# Altium PCB PCB.PcbDoc (part 2 of 2)
Units mil, origin at the board's own origin, x right, y up, seen from the top; angles counter-clockwise.
Board outline 7300 x 4900 mil, 2 copper layers (Top Layer, Bottom Layer); 73 components, 57 nets, 300 pads, 64 vias.
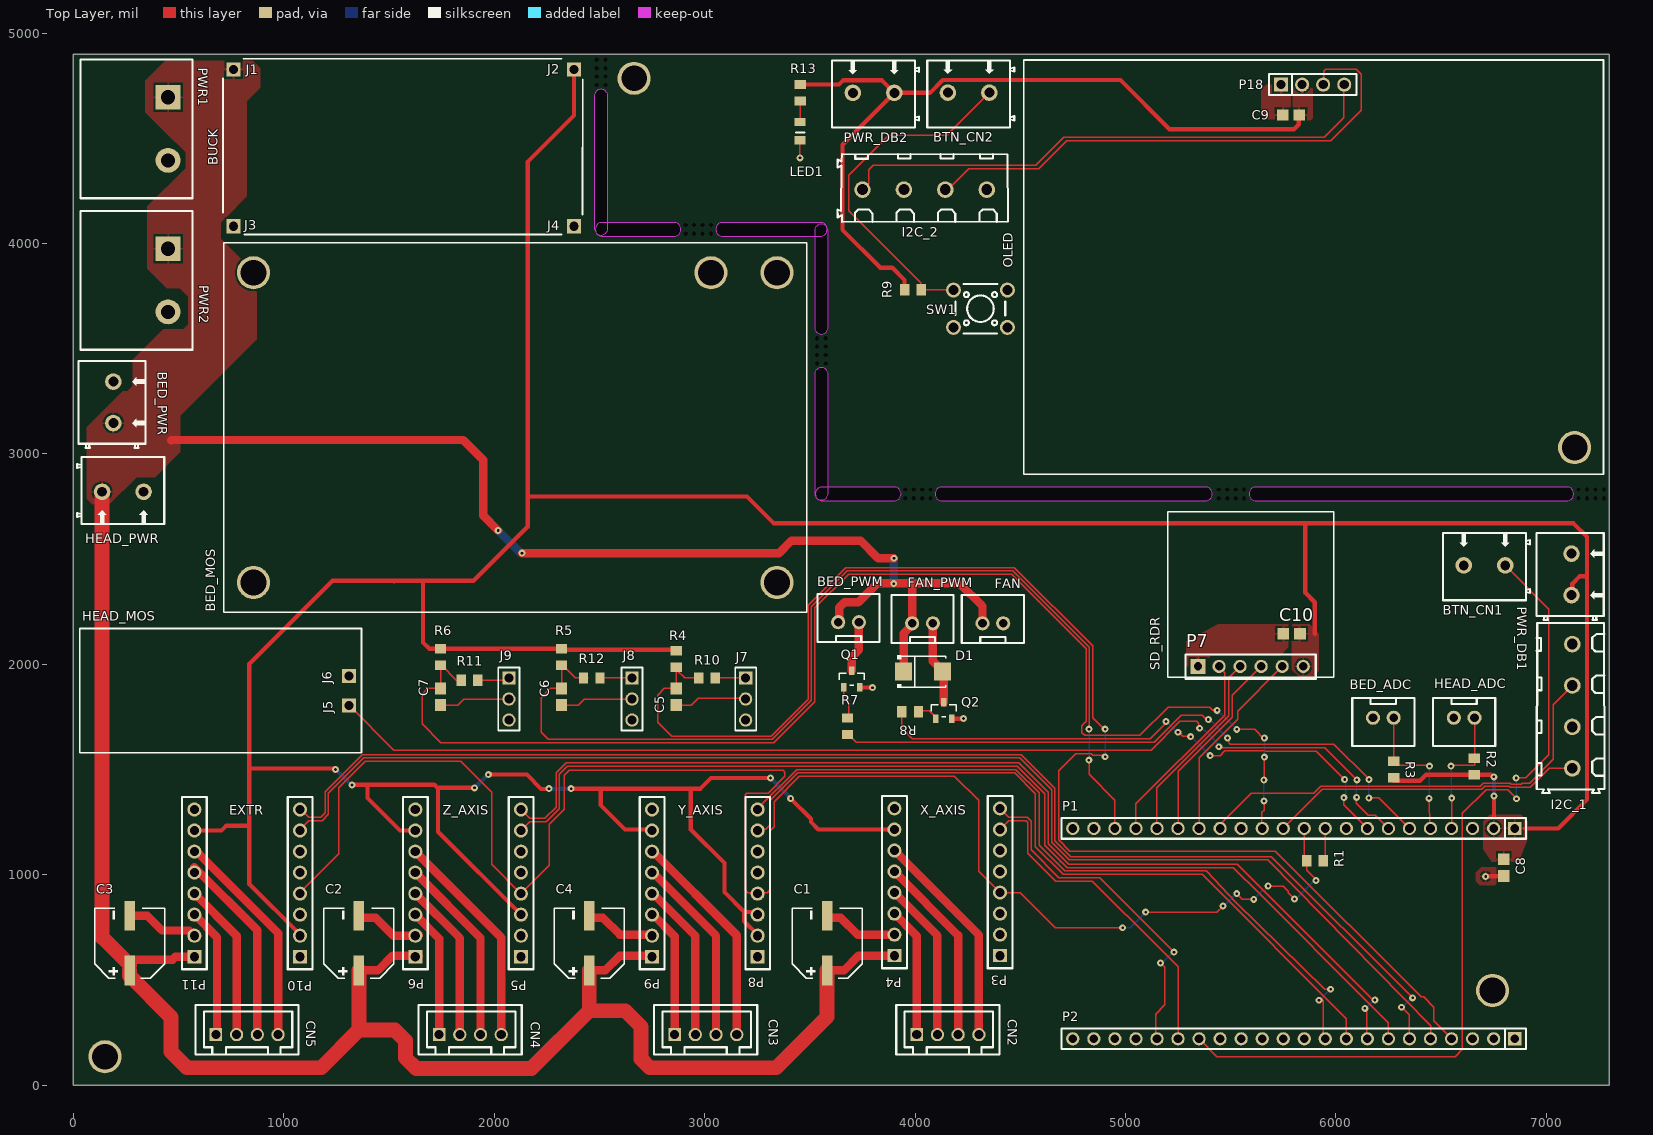
[diagram p0: Top Layer view]

## Via types
v1: diameter 33, hole 13, Top Layer to Bottom Layer, 64 vias

## Nets (pads, with @x,y where several pads share a name; then routed paths per layer and width w, separated by ;. In a path a pad name is that pad's centre, name@x,y a point inside that pad or via, vN(x,y) a via of type N, cw(c..) or ccw(c..) an arc to the next point about the centre after c; other vN are vias at no path point) (continued)
pads on no net: BED_MOS.1 J7.3 J8.3 J9.3 P1.3 P1.9 P1.14 P1.21 P2.2 P2.3 P2.11 P2.12 P2.13 P2.14 P2.15 P2.19 P2.20 P3.5 P3.6 P5.5 P5.6 P8.5 P8.6 P10.5 P10.6 SW1.2 SW1.4

## Polygon pours and split planes (outlines as drawn)
GND_DB on Bottom Layer "GND_DB_L02_P004" (solid, pour order 4): 2508,4900 7300,4900 7300,2810 3555,2810 3555,4067 2508,4067
GND_MB on Bottom Layer "GND_MB_L02_P000" (solid, pour order 0): 2508,4900 2508,4067 3555,4067 3555,2810 7300,2810 7300,0 0,0 0,4900
3V3_DB on Top Layer "3V3_DB_L01_P011" (solid, pour order 11): 5890,4595 5880,4585 5795,4585 5790,4590 5790,4750 5795,4755 5870,4755 5890,4735
GND_DB on Top Layer "GND_DB_L01_P009" (solid, pour order 9): 5780.31,4590.31 5785,4595 5785,4750 5780,4755 5670,4755 5645,4730 5645,4610 5664.69,4590.31
GND_MB on Top Layer "GND_MB_L01_P008" (solid, pour order 8): 6793,994.2 6793,1012 6770,1035 6690,1035 6665,1010 6665,970 6685,950 6755,950 6791.9,976.9
3V3_MB on Top Layer "3V3_MB_L01_P006" (solid, pour order 6): 5875,2190 5920,2145 5920,1970 5890,1940 5825,1940 5790,1975 5790,2142.5 5790,2190
GND_MB on Top Layer "GND_MB_L01_P005" (solid, pour order 5): 5290,1990 5290,2110 5437.69,2190 5775,2190 5775,2080 5735,2040 5405,2040 5395,2030 5395,1990 5345,1990
3V3_MB on Top Layer "3V3_MB_L01_P002" (solid, pour order 2): 6700,1253 6731,1284 6882,1284 6913,1253 6913,1173.2 6870.5,1060.97 6742,1060.97 6700,1121.48
24V on Top Layer "24V_L01_P001" (solid, pour order 1): 824.5,4675.5 824.5,4223.5 701,4100 701,4023 871,3853 871,3546 507,3182 507,3008 507.5,3008 389.5,2890 300,2890 170,2760 90,2760 90,2761 64,2787 64,3127 234,3297 256,3297 283,3323 283,3447 428,3592 522,3592 546,3616 546,3747 505,3788 443,3788 352,3879 352,4176 533,4357 533,4433 440,4526 439,4526 341,4624 341,4776 343,4776 436,4869 852,4869 888,4833 888,4739

## Keep-outs
Bottom Layer:
  lines w70: 2508,4913 2508,4067 3555,4067 3555,2810 7344,2810

## Silkscreen, mask and mechanical layers (free items; w line width, h text height)
Top Overlay:
  text "EXTR" at 740,1285 h45
  text "Z_AXIS" at 1755,1285 h45
  text "Y_AXIS" at 2875,1285 h45
  text "X_AXIS" at 4025,1285 h45
Bottom Overlay:
  text "Made By Zika & Sean" at 2225,4795 h45
  text "01-10-26" at 2225,4707.5 h45
  text "REV 1.0.0" at 2225,4620 h45
  text "Made By Zika & Sean" at 6900,3110 h45
  text "01-10-26" at 6900,3022.5 h45
  text "REV 1.0.0" at 6900,2935 h45